# Altium PCB FPGA_ROMI_Board.PcbDoc
Units mil, origin at the board's own origin, x right, y up, seen from the top; angles counter-clockwise.
Board outline 4074.6 x 4802 mil, 2 copper layers (Top Layer, Bottom Layer); 17 components, 0 nets, 113 pads, 3 vias.
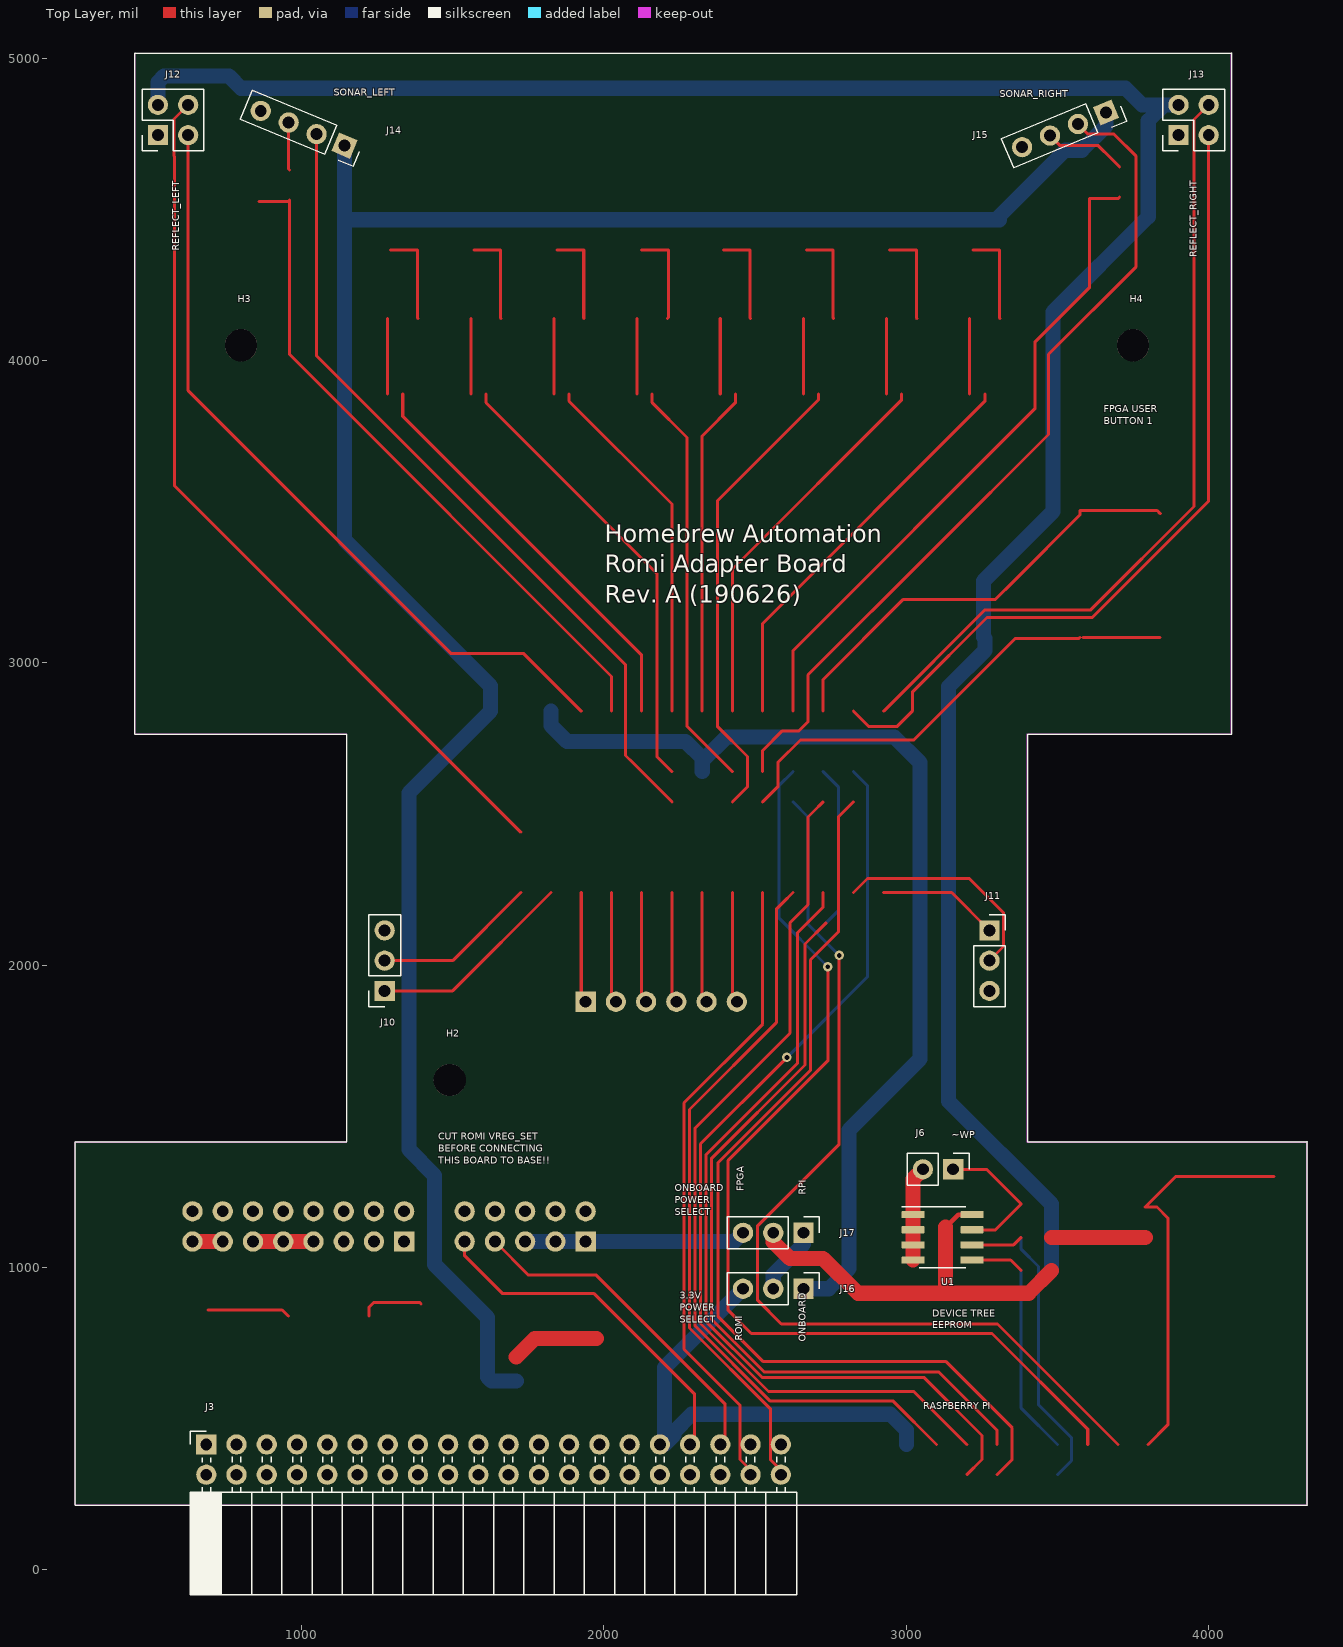
[diagram p0: Top Layer view]
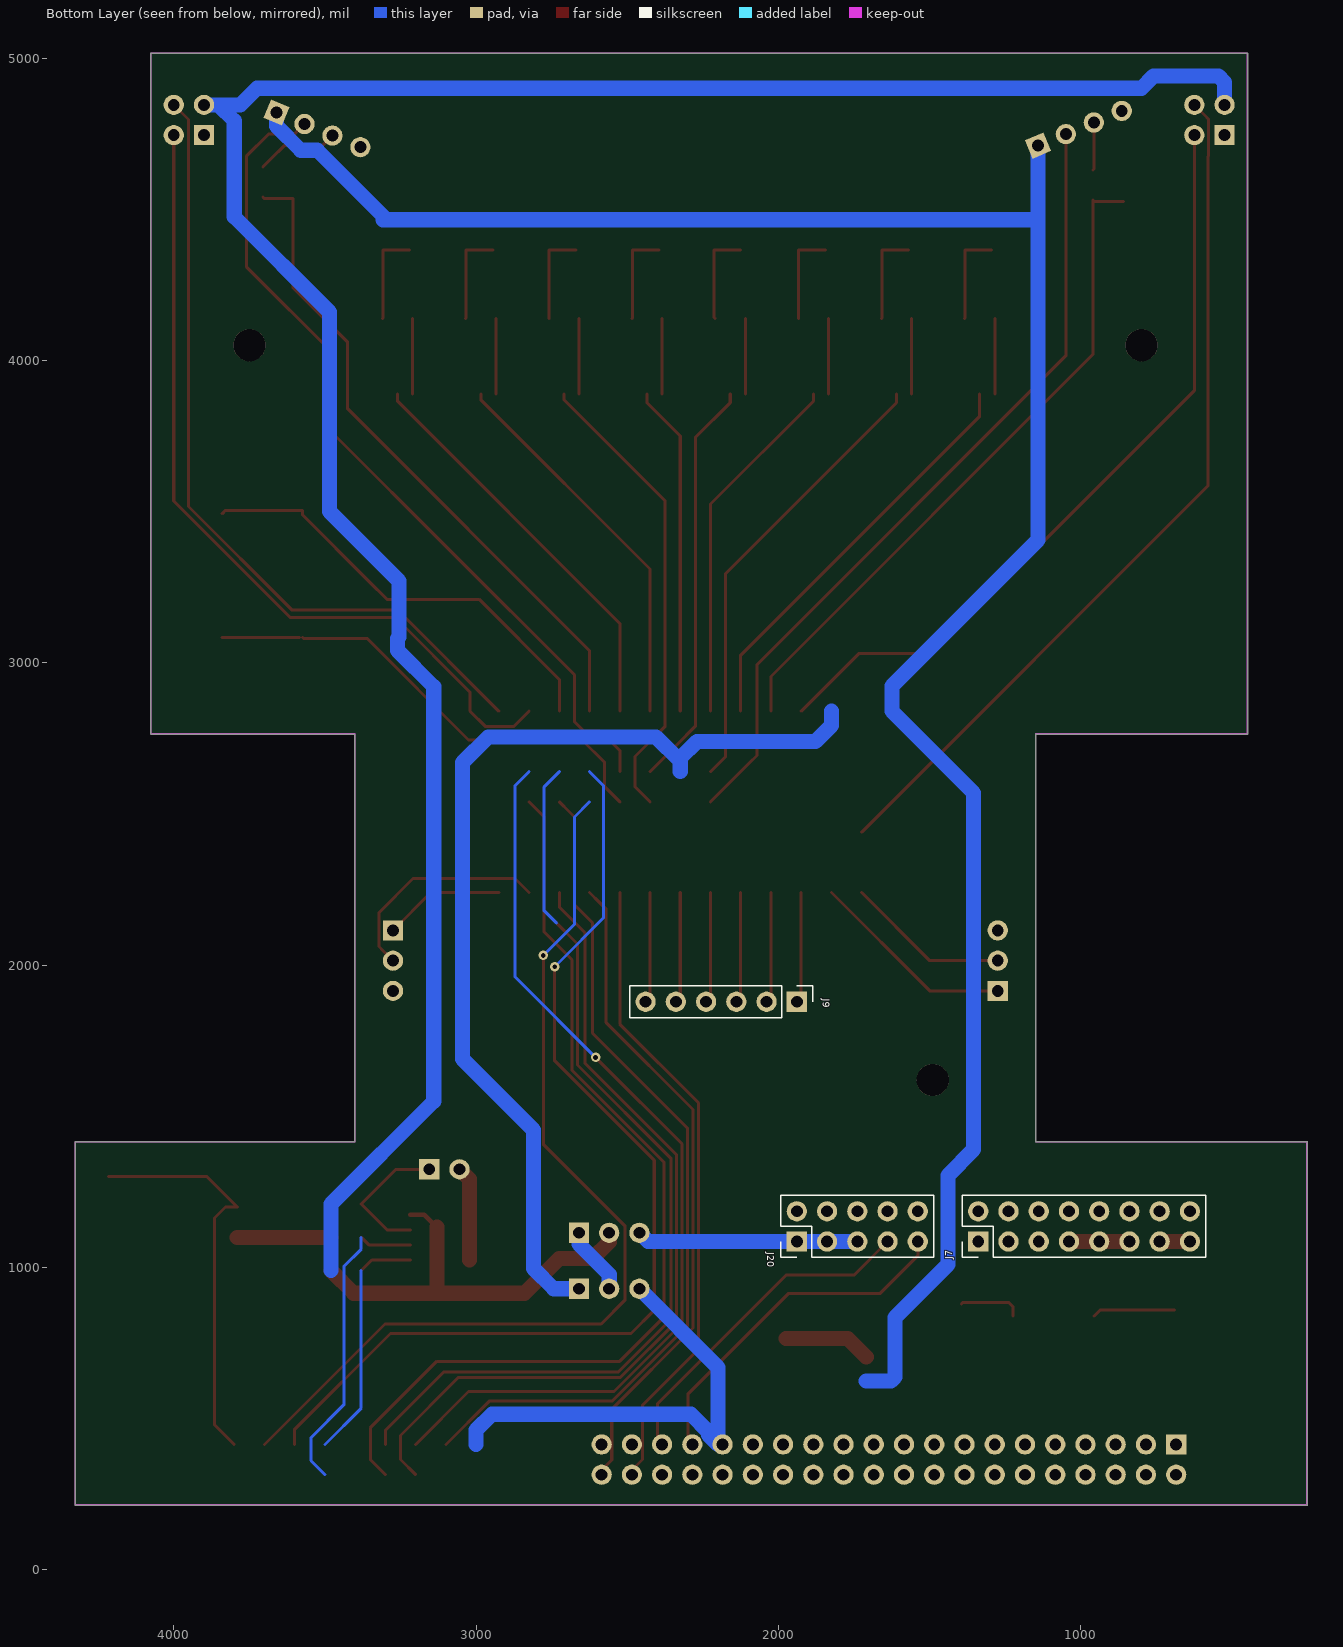
[diagram p1: Bottom Layer view, seen from below]

## Layer stack, top to bottom
Top Solder: solder mask 0.4, Solder Resist, Dk 3.5
Top Layer: signal copper 1.4
Dielectric 1: dielectric 12.6, FR-4, Dk 4.8
Bottom Layer: signal copper 1.4
Bottom Solder: solder mask 0.4, Solder Resist, Dk 3.5

## Board outline
251.4,215 ccw(c252.4,215) 252.4,214 4325,214 ccw(c4325,215) 4326,215 4326,1415 ccw(c4325,1415) 4325,1416 3401,1416 3401,2764 4075,2764 ccw(c4075,2765) 4076,2765 4076,5015 ccw(c4075,5015) 4075,5016 450,5016 ccw(c450,5015) 449,5015 449,2765 ccw(c450,2765) 450,2764 1149,2764 1149,1416 252.4,1416 ccw(c252.4,1415) 251.4,1415

## Design rules (kind name [scope] priority, off if disabled: settings)
Clearance [All] p1: gap=10 ignorepadtopadclearanceinfootprint=FALSE except(0: Arc-Hole Track-Hole SMDPad-Hole THPad-Hole Via-Hole Fill-Hole Poly-Hole Region-Hole Text-Hole)
PolygonConnect [All] p1: connectstyle=Relief reliefconductorwidth=10 reliefentries=4 polygonreliefangle="90 Angle" airgapwidth=10
RoutingVias [All] p1: holewidth=28 width=50 viastyle="Through Hole" minholewidth=28 minwidth=50 maxholewidth=28 maxwidth=50
SolderMaskExpansion [All] p1: expansion=4 istentingtop=FALSE
Width [All] p1: maxlimit=10 minlimit=10 preferedwidth=10
30 further rules are at their usual default settings.

## Components (designator, comment, footprint, x,y, rotation, side; value= is the part's Value field where it differs from the comment)
H2 "MountingHole" MountingHole_2.7mm_M2.5 1490,1620 r0 top
H3 "MountingHole" MountingHole_2.7mm_M2.5 800,4050 r0 top
H4 "MountingHole" MountingHole_2.7mm_M2.5 3750,4050 r0 top
J3 "Raspberry_Pi_2_3" PinSocket_2x20_P2.54mm_Horizontal 685,415 r90 top locked
J6 "PinHeader_1x02_P2.54mm_Vertical" PinHeader_1x02_P2.54mm_Vertical 3155,1325 r270 top
J7 "PinHeader_2x08_P2.54mm_Vertical" PinHeader_2x08_P2.54mm_Vertical 1339.5,1086.1 r270 bottom locked
J9 "PinHeader_1x06_P2.54mm_Vertical" PinHeader_1x06_P2.54mm_Vertical 1939.5,1879 r90 bottom locked
J10 "PinSocket_1x03_P2.54mm_Vertical" PinSocket_1x03_P2.54mm_Vertical 1275,1915 r180 top
J11 "PinSocket_1x03_P2.54mm_Vertical" PinSocket_1x03_P2.54mm_Vertical 3275,2115 r0 top
J12 "PinSocket_2x02_P2.54mm_Vertical" PinSocket_2x02_P2.54mm_Vertical 525,4745 r180 top
J13 "PinSocket_2x02_P2.54mm_Vertical" PinSocket_2x02_P2.54mm_Vertical 3900,4745 r180 top
J14 "PinSocket_1x04_P2.54mm_Vertical" PinSocket_1x04_P2.54mm_Vertical 1142.16,4710.19 r247.5 top
J15 "PinSocket_1x04_P2.54mm_Vertical" PinSocket_1x04_P2.54mm_Vertical 3660,4820 r292.5 top
J16 "PinHeader_1x03_P2.54mm_Vertical" PinHeader_1x03_P2.54mm_Vertical 2660,930 r270 top
J17 "PinHeader_1x03_P2.54mm_Vertical" PinHeader_1x03_P2.54mm_Vertical 2660,1115 r270 top
J20 "PinHeader_2x05_P2.54mm_Vertical" PinHeader_2x05_P2.54mm_Vertical 1939.5,1086.1 r270 bottom locked
U1 "CAT24C128" SOIC-8_3.9x4.9mm_P1.27mm 3120,1100 r0 top

## Footprints (in the part's own frame and the unit in brackets; to place one, negate y for a bottom-side part, rotate by r counter-clockwise, add the part's x,y. Pads: shape width x height; smd on the part's side, far side on the other; paste and mask are expansions set on the pad)
MountingHole_2.7mm_M2.5 [mm]
  round 2.7 hole 2.7 paste-2.7 mask+0.051: 1(0,0)
PinHeader_1x02_P2.54mm_Vertical [mm]
  rect 1.7x1.7 hole 1 paste-1.7 mask+0.051: 1(0,0)
  rrect100% 1.7x1.7 hole 1 paste-1.7 mask+0.051: 2(0,-2.54)
  silkscreen extent -1.33,-3.87 1.33,1.33
PinHeader_1x03_P2.54mm_Vertical [mm]
  rect 1.7x1.7 hole 1 paste-1.7 mask+0.051: 1(0,0)
  rrect100% 1.7x1.7 hole 1 paste-1.7 mask+0.051: 2(0,-2.54) 3(0,-5.08)
  silkscreen extent -1.33,-6.41 1.33,1.33
PinHeader_1x06_P2.54mm_Vertical [mm]
  rect 1.7x1.7 hole 1 paste-1.7 mask+0.051: 1(0,0)
  rrect100% 1.7x1.7 hole 1 paste-1.7 mask+0.051: 2(0,2.54) 3(0,5.08) 4(0,7.62) 5(0,10.16) 6(0,12.7)
  silkscreen extent -1.33,-1.33 1.33,14.03
PinHeader_2x05_P2.54mm_Vertical [mm]
  rect 1.7x1.7 hole 1 paste-1.7 mask+0.051: 1(0,0)
  rrect100% 1.7x1.7 hole 1 paste-1.7 mask+0.051: 2(-2.54,0) 3(0,2.54) 4(-2.54,2.54) 5(0,5.08) 6(-2.54,5.08) 7(0,7.62) 8(-2.54,7.62) 9(0,10.16) 10(-2.54,10.16)
  silkscreen extent -3.87,-1.33 1.33,11.49
PinHeader_2x08_P2.54mm_Vertical [mm]
  rect 1.7x1.7 hole 1 paste-1.7 mask+0.051: 1(0,0)
  rrect100% 1.7x1.7 hole 1 paste-1.7 mask+0.051: 2(-2.54,0) 3(0,2.54) 4(-2.54,2.54) 5(0,5.08) 6(-2.54,5.08) 7(0,7.62) 8(-2.54,7.62) 9(0,10.16) 10(-2.54,10.16) 11(0,12.7) 12(-2.54,12.7) 13(0,15.24) 14(-2.54,15.24) 15(0,17.78) 16(-2.54,17.78)
  silkscreen extent -3.87,-1.33 1.33,19.11
PinSocket_1x03_P2.54mm_Vertical [mm]
  rect 1.7x1.7 hole 1 paste-1.7 mask+0.051: 1(0,0)
  rrect100% 1.7x1.7 hole 1 paste-1.7 mask+0.051: 2(0,-2.54) 3(0,-5.08)
  silkscreen extent -1.33,-6.41 1.33,1.33
PinSocket_1x04_P2.54mm_Vertical [mm]
  rect 1.7x1.7 hole 1 paste-1.7 mask+0.051: 1(0,0)
  rrect100% 1.7x1.7 hole 1 paste-1.7 mask+0.051: 2(0,-2.54) 3(0,-5.08) 4(0,-7.62)
  silkscreen extent -1.33,-8.95 1.33,1.33
PinSocket_2x02_P2.54mm_Vertical [mm]
  rect 1.7x1.7 hole 1 paste-1.7 mask+0.051: 1(0,0)
  rrect100% 1.7x1.7 hole 1 paste-1.7 mask+0.051: 2(-2.54,0) 3(0,-2.54) 4(-2.54,-2.54)
  silkscreen extent -3.87,-3.87 1.33,1.33
PinSocket_2x20_P2.54mm_Horizontal [mm]
  rect 1.7x1.7 hole 1 paste-1.7 mask+0.051: 1(0,0)
  rrect100% 1.7x1.7 hole 1 paste-1.7 mask+0.051: 2(-2.54,0) 3(0,-2.54) 4(-2.54,-2.54) 5(0,-5.08) 6(-2.54,-5.08) 7(0,-7.62) 8(-2.54,-7.62) 9(0,-10.16) 10(-2.54,-10.16) 11(0,-12.7) 12(-2.54,-12.7) 13(0,-15.24) 14(-2.54,-15.24) 15(0,-17.78) 16(-2.54,-17.78) 17(0,-20.32) 18(-2.54,-20.32) 19(0,-22.86) 20(-2.54,-22.86) 21(0,-25.4) 22(-2.54,-25.4) 23(0,-27.94) 24(-2.54,-27.94) 25(0,-30.48) 26(-2.54,-30.48) 27(0,-33.02) 28(-2.54,-33.02) 29(0,-35.56) 30(-2.54,-35.56) 31(0,-38.1) 32(-2.54,-38.1) 33(0,-40.64) 34(-2.54,-40.64) 35(0,-43.18) 36(-2.54,-43.18) 37(0,-45.72) 38(-2.54,-45.72) 39(0,-48.26) 40(-2.54,-48.26)
  silkscreen extent -12.63,-49.59 1.11,1.33
SOIC-8_3.9x4.9mm_P1.27mm [mm]
  rrect25% 1.95x0.6 smd mask+0.051: 1(-2.475,1.905) 2(-2.475,0.635) 3(-2.475,-0.635) 4(-2.475,-1.905) 5(2.475,-1.905) 6(2.475,-0.635) 7(2.475,0.635) 8(2.475,1.905)
  silkscreen extent -3.45,-2.56 1.95,2.56

## Part data
H2 H3 H4: library part MountingHole_2.7mm_M2.5, "Mounting Hole 2.7mm, no annular, M2.5"
J3: library part PinSocket_2x20_P2.54mm_Horizontal, "Through hole angled socket strip, 2x20, 2.54mm pitch, 8.51mm socket length, double cols (from Kicad 4.0.7), script generated"
J6: "Through hole straight pin header, 1x02, 2.54mm pitch, single row"
J7: "Through hole straight pin header, 2x08, 2.54mm pitch, double rows"
J9: "Through hole straight pin header, 1x06, 2.54mm pitch, single row"
J10 J11: "Through hole straight socket strip, 1x03, 2.54mm pitch, single row (from Kicad 4.0.7), script generated"
J12 J13: "Through hole straight socket strip, 2x02, 2.54mm pitch, double cols (from Kicad 4.0.7), script generated"
J14 J15: "Through hole straight socket strip, 1x04, 2.54mm pitch, single row (from Kicad 4.0.7), script generated"
J16 J17: "Through hole straight pin header, 1x03, 2.54mm pitch, single row"
J20: "Through hole straight pin header, 2x05, 2.54mm pitch, double rows"
U1: library part SOIC-8_3.9x4.9mm_P1.27mm, "SOIC, 8 Pin (JEDEC MS-012AA, https://www.analog.com/media/en/package-pcb-resources/package/pkg_pdf/soic_narrow-r/r_8.pdf), generated with kicad-footprint-generator ipc_gullwing_generator.py"

## Via types
v1: diameter 31.5, hole 15.75, Top Layer to Bottom Layer, tented both sides, 3 vias

## Nets (pads, with @x,y where several pads share a name; then routed paths per layer and width w, separated by ;. In a path a pad name is that pad's centre, name@x,y a point inside that pad or via, vN(x,y) a via of type N, cw(c..) or ccw(c..) an arc to the next point about the centre after c; other vN are vias at no path point)
pads on no net: H2.1 H3.1 H4.1 J3.1 J3.2 J3.3 J3.4 J3.5 J3.6 J3.7 J3.8 J3.9 J3.10 J3.11 J3.12 J3.13 J3.14 J3.15 J3.16 J3.17 J3.18 J3.19 J3.20 J3.21 J3.22 J3.23 J3.24 J3.25 J3.26 J3.27 J3.28 J3.29 J3.30 J3.31 J3.32 J3.33 J3.34 J3.35 J3.36 J3.37 J3.38 J3.39 J3.40 J6.1 J6.2 J7.1 J7.2 J7.3 J7.4 J7.5 J7.6 J7.7 J7.8 J7.9 J7.10 J7.11 J7.12 J7.13 J7.14 J7.15 J7.16 J9.1 J9.2 J9.3 J9.4 J9.5 J9.6 J10.1 J10.2 J10.3 J11.1 J11.2 J11.3 J12.1 J12.2 J12.3 J12.4 J13.1 J13.2 J13.3 J13.4 J14.1 J14.2 J14.3 J14.4 J15.1 J15.2 J15.3 J15.4 J16.1 J16.2 J16.3 J17.1 J17.2 J17.3 J20.1 J20.2 J20.3 J20.4 J20.5 J20.6 J20.7 J20.8 J20.9 J20.10 U1.1 U1.2 U1.3 U1.4 U1.5 U1.6 U1.7 U1.8
copper on no net: | length 100970.9
  Top Layer w10: 625,4745 625,3900 1495,3030 1735,3030 1925,2840 ; 625,4845 591.54,4811.54 578.54,4798.54 578.54,4676.46 580,4675 580,3585 1725,2440 ; 690,860 936.14,860 956.14,840 ; 860,4525 955,4525 960,4530 960,4020 2025,2955 2025,2840 ; 957.39,4786.73 957.39,4632.61 960,4630 ; 1049.78,4748.46 1049.78,4015.22 2071.46,2993.54 2071.46,2693.54 2095,2670 2225,2540 ; 1223.86,840 1223.86,869.53 1239.33,885 1390,885 1395,880 ; 1275,1915 1500,1915 1825,2240 ; 1275,2015 1500,2015 1725,2240 ; 1284.7,3888.3 1284.7,4138.3 ; 1295,4365.3 1383.3,4365.3 1383.3,4139.7 1384.7,4138.3 ; 1334.7,3888.3 1334.7,3815.3 2125,3025 2125,2840 ; 1539.5,1086.1 1539.5,1038.77 1663.27,915 1966.17,915 2300,581.17 2300,462.33 2300,415 ; 1559.7,3888.3 1559.7,4138.3 ; 1570,4365.3 1658.3,4365.3 1658.3,4139.7 1659.7,4138.3 ; 1609.7,3888.3 1609.7,3860.3 2175,3295 2175,2745 ; 1639.5,1086.1 1750.6,975 1975,975 2400,550 2400,415 ; 1834.7,3888.3 1834.7,4138.3 ; 1845,4365.3 1933.3,4365.3 1933.3,4139.7 1934.7,4138.3 ; 1884.7,3888.3 1884.7,3865.3 2225,3525 2225,2840 ; 1925,2240 1925,1893.5 1939.5,1879 ; 2025,2240 2025,1893.5 2039.5,1879 ; 2109.7,3888.3 2109.7,4138.3 ; 2125,2240 2125,1893.5 2139.5,1879 ; 2125,4365.3 2213.3,4365.3 2213.3,4141.9 2209.7,4138.3 ; 2159.7,3888.3 2159.7,3860.3 2275,3745 2275,2790 2335,2730 2425,2640 ; 2175,2740 2175,2745 ; 2225,2240 2225,1893.5 2239.5,1879 ; 2225,2640 2175,2690 2175,2745 ; 2325,2240 2325,1893.5 2339.5,1879 ; 2325,2840 2325,3750 2434.7,3859.7 2434.7,3888.3 ; 2384.7,3888.3 2384.7,4138.3 ; 2395,4365.3 2483.3,4365.3 2483.3,4139.7 2484.7,4138.3 ; 2425,2240 2425,1893.5 2439.5,1879 ; 2425,2540 2475,2590 2475,2595 2475,2690 2375,2790 2375,3535 2709.7,3869.7 2709.7,3888.3 ; 2425,2840 2425,3310 2984.7,3869.7 2984.7,3888.3 ; 2500,315 2450,365 2450,545 2265,730 2265,1545 2525,1805 2525,2192.67 2525,2240 ; 2525,2540 2575,2590 2575,2670 2650,2745 3025,2745 3360,3080 3570.49,3080 3573.79,3083.3 ; 2525,2640 2525,2710 2590,2775 2645,2775 2675,2805 2675,2960 3092.5,3377.5 ; 2525,2840 2525,3130 3259.7,3864.7 3259.7,3888.3 ; 2600,315 2551.54,363.46 2551.54,531.64 2283,800.18 2283,1523 2570,1810 2570,2185 2591.54,2206.54 2625,2240 ; v1(2605,1695) 2589.25,1679.25 2319,1409 2319,815.09 2544.09,590 3025,590 3200,415 ; 2625,2840 2625,3040 3425,3840 3425,4060 3605,4240 3605,4535 3700,4535 3705,4540 ; 2659.7,3888.3 2659.7,4138.3 ; 2670,4365.3 2758.3,4365.3 2758.3,4139.7 2759.7,4138.3 ; 2725,2240 2725,2192.67 2640,2107.67 2640,1675.46 2337,1372.46 2337,822.54 2522.54,637 3058,637 3250,445 3250,365 3200,315 ; 2725,2540 2691.54,2506.54 2675,2490 2675,2200 2615,2140 2615,1775 2301,1461 2301,807.63 2550.38,558.25 2956.75,558.25 3100,415 ; 2725,2840 2725,2945 2990,3210 3295,3210 3355,3270 3573.79,3488.79 3573.79,3503.3 3829.7,3503.3 3840,3493 ; 2735,2140 2665,2070 2665,1670 2355,1360 2355,830 2530,655 3107.33,655 3300,462.33 3300,415 ; v1(2740.33,1994.67) 2740.33,1972.4 2740.33,1683.96 2411,1354.63 2411,858.54 2487.54,782 3283.46,782 3600,465.46 3600,415 ; v1(2777.83,2032.17) 2777.83,1407.63 2508.46,1138.26 2508.46,891.54 2586.54,813.46 3301.54,813.46 3700,415 ; 2825,2240 2871.46,2286.46 3208.54,2286.46 3321.46,2173.54 3321.46,2061.46 3308.46,2048.46 3275,2015 ; 2825,2540 2775,2490 2775,2109.54 2683,2017.54 2683,1652.54 2378,1347.54 2378,837.46 2525.46,690 3130,690 3350,470 3350,365 3333.46,348.46 3300,315 ; 2825,2840 2875,2790 2970,2790 3020,2840 3020,2902.99 3267.01,3150 3615,3150 4000,3535 4000,4697.67 4000,4745 ; 2925,2240 3150,2240 3275,2115 ; 2925,2840 3260,3175 3610,3175 3951.54,3516.54 3951.54,4796.54 4000,4845 ; 2934.7,3888.3 2934.7,4092.87 2934.7,4138.3 ; 2945,4365.3 3033.3,4365.3 3033.3,4139.7 3034.7,4138.3 ; 3086.23,3370 3086.23,3371.23 3092.5,3377.5 ; 3155,1325 3265,1325 3380,1210 3295,1125 3217.44,1125 ; 3209.7,3888.3 3209.7,4138.3 ; 3217.44,1025 3345,1025 3380,990 ; 3217.44,1075 3355,1075 3380,1100 ; 3220,4365.3 3308.3,4365.3 3308.3,4139.7 3309.7,4138.3 ; 3475.22,4743.46 3508.69,4710 3635,4710 3677.44,4667.56 3705,4640 ; 3567.61,4781.73 3601.08,4748.27 3686.73,4748.27 3760,4675 3760,4310 3470,4020 3470,3755 3092.5,3377.5 ; 3583.79,3083.3 3839.7,3083.3 ; 3800,415 3865,480 3865,1163.97 3828.97,1200 3790,1200 3891.7,1301.7 3960.3,1301.7 4216.21,1301.7
  Top Layer w15: 3130,1133.79 3171.21,1175 3217.44,1175
  Top Layer w50: 639.5,1086.1 739.5,1086.1 ; 839.5,1086.1 1039.5,1086.1 ; 1710,703.74 1771.26,765 1975,765 ; 2560,1115 2560,1085.07 2615.07,1030 2725,1030 2840,915 3130,915 ; 3022.56,1025 3022.56,1292.56 3055,1325 ; 3130,1133.79 3130,915 ; 3480,990 3405,915 3130,915 ; 3480,1100 3790,1100
  Bottom Layer w10: v1(2605,1695) 2620.75,1710.75 2840,1930 2871.46,1961.46 2871.46,2593.54 2825,2640 ; 2625,2540 2675,2490 2675,2135 v1(2777.83,2032.17) ; 2625,2640 2578.54,2593.54 2578.54,2156.46 2724.58,2010.42 v1(2740.33,1994.67) ; 2725,2640 2775,2590 2775,2180 2735,2140 ; 3380,990 3380,535 3500,415 ; 3380,1100 3380,1061.03 3437.44,1003.58 3437.44,546.33 3546.46,437.3 3546.46,361.46 3533.46,348.46 3500,315
  Bottom Layer w50: 525,4845 525,4920 545,4940 760,4940 800,4900 3725,4900 3780,4845 3852.67,4845 ; 1710,625 1628.5,625 1615,638.5 1615,835 1440,1010 1440,1305 1355,1390 1355,2570 1625,2840 1625,2923.46 1142.16,3406.3 1142.16,4670.04 1142.16,4710.19 1142.16,4465.3 1295,4465.3 3308.3,4465.3 ; 1739.5,1086.1 2431.1,1086.1 2460,1115 ; 1825,2840 1825,2792.67 1877.67,2740 2270,2740 2325,2685 2325,2640 2325,2675 2405,2755 2960,2755 3045,2670 3045,1690 2810,1455 2810,996.54 2743.46,930 2660,930 ; 2460,930 2200,670 2200,415 2231.54,446.54 2231.54,456.54 2290,515 2947.33,515 3000,462.33 3000,415 ; 2560,930 2560,977.33 2660,1077.33 2660,1115 ; 3033.3,4465.3 3220,4465.3 3258.97,4465.3 3295.72,4465.3 3525.42,4695 3580,4695 3660,4775 3660,4820 ; 3480,1028.97 3480,1100 ; 3480,1028.97 3480,1100 ; 3480,1028.97 3480,990 3480,1028.97 ; 3480,1100 3480,1210 ; 3480,1100 3480,1210 ; 3480,1210 3140,1550 3140,2921.03 3260,3041.03 3260,3080 3255,3085 3255,3270 3485,3500 3485,4160 3800,4475 3800,4792.33 3852.67,4845 ; 3852.67,4845 3900,4845 3852.67,4845

## Keep-outs
Keep-Out Layer:
  lines w1.97: 252.4,215 252.4,1415 ; 252.4,215 4325,215 ; 252.4,215 252.4,1415 ; 252.4,215 4325,215 ; 252.4,1415 1150,1415 ; 252.4,1415 1150,1415 ; 450,2765 450,5015 ; 450,2765 1150,2765 ; 450,2765 450,5015 ; 450,2765 1150,2765 ; 450,5015 4075,5015 ; 450,5015 4075,5015 ; 1150,1415 1150,2765 ; 1150,1415 1150,2765 ; 3400,1415 4325,1415 ; 3400,1415 3400,2765 ; 3400,1415 4325,1415 ; 3400,1415 3400,2765 ; 3400,2765 4075,2765 ; 3400,2765 4075,2765 ; 4075,2765 4075,5015 ; 4075,2765 4075,5015 ; 4325,215 4325,1415 ; 4325,215 4325,1415

## Silkscreen, mask and mechanical layers (free items; w line width, h text height)
Top Overlay:
  the board outline again, w2
  text "SONAR_LEFT" at 1105.89,4866.93 h39.37
  text "SONAR_RIGHT" at 3309.43,4861.93 h39.37
  text "REFLECT_LEFT" at 603.07,4362.7 h39.37 r90
  text "REFLECT_RIGHT" at 3968.07,4341.24 h39.37 r90
  text "FPGA USER / BUTTON 1" at 3653.48,3780.43 h39.37
  text "Homebrew Automation / Romi Adapter Board / Rev. A (190626)" at 2002.4,3179.21 h100
  text "~WP" at 3149.7,1418.95 h39.37
  text "CUT ROMI VREG_SET / BEFORE CONNECTING / THIS BOARD TO BASE!!" at 1452.37,1335.19 h39.37
  text "FPGA" at 2471.19,1252.05 h39.37 r90
  text "RPI" at 2675.9,1241.57 h39.37 r90
  text "ONBOARD / POWER / SELECT" at 2235,1165 h39.37
  text "3.3V / POWER / SELECT" at 2250,810 h39.37
  text "DEVICE TREE / EEPROM" at 3085.83,790.43 h39.37
  text "ROMI" at 2466.19,758.23 h39.37 r90
  text "ONBOARD" at 2675,755 h39.37 r90
  text "RASPBERRY PI" at 3055.37,523.81 h39.37
Mechanical 2:
  drawing of 882 lines, arcs and shapes, not listed